# EAGLE board adapter_single (EAGLE 6.5.0)
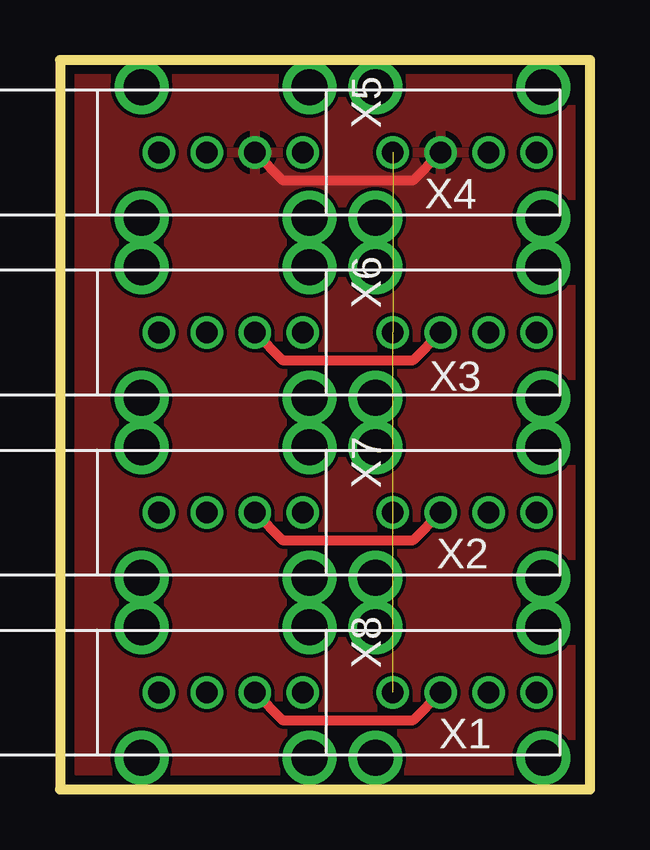
[diagram p0: board, top side]
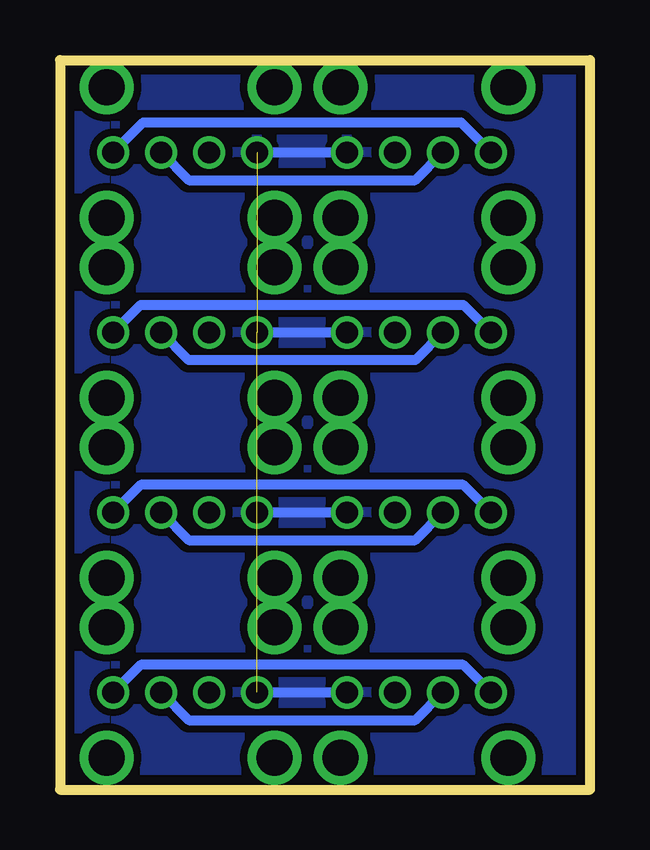
[diagram p1: board, bottom side, seen from below]

Size 22.1 x 30.4 mm. Coordinates in mm from the lower left corner, seen from the top.
Outline: 22.1,0 0,0 0,30.4 22.1,30.4 22.1,0
Copper layers (1*16): Top 0.0356mm / dielectric 1.5011mm / Bottom 0.0356mm
Design rules "LaenPCBOrder": minimum track width 6mil, minimum drill 13mil, track to track 6mil, track to pad 6mil, pad to pad 6mil, via to via 6mil, smd to smd 6mil, copper to edge 15mil, drill to drill 6mil, minimum pad ring 7mil, minimum via ring 7mil, stop-mask expansion 3mil, vias tented up to drill 0mil, thermal gap 10mil

## Footprints (pad centres in the part's own frame; a part is rotated, then mirrored left to right if it is on the bottom)
USB-A-HU = drill 0.9: D+ 2.73,0; D- 4.73,0; GND 0.73,0; VBUS 6.73,0 | drill 1.5: P$5 0,2.72; P$6 0,-2.72; P$7 7,2.72; P$8 7,-2.72

## Placement (x,y rotation side)
X1  USB-A-HU  [USB-A-HU]  13.15,4.05 0 top
X2  USB-A-HU  [USB-A-HU]  13.15,11.55 0 top
X3  USB-A-HU  [USB-A-HU]  13.15,19.05 0 top
X4  USB-A-HU  [USB-A-HU]  13.15,26.55 0 top
X5  USB-A-HU  [USB-A-HU]  3.4,26.55 0 top
X6  USB-A-HU  [USB-A-HU]  3.4,19.05 0 top
X7  USB-A-HU  [USB-A-HU]  3.4,11.55 0 top
X8  USB-A-HU  [USB-A-HU]  3.4,4.05 0 top

## Library data of the parts
X1-X8 = con-usb

## Nets
DM1: X4.D- X5.D+
DP1: X4.D+ X5.D-
GND: X1.GND X2.GND X3.GND X4.GND X5.VBUS X6.VBUS X7.VBUS X8.VBUS
N$1: X1.VBUS X8.GND
N$3: X3.D+ X6.D-
N$4: X3.D- X6.D+
N$6: X2.D+ X7.D-
N$7: X2.D- X7.D+
N$9: X1.D+ X8.D-
N$10: X2.VBUS X7.GND
N$11: X3.VBUS X6.GND
N$12: X4.VBUS X5.GND
N$13: X1.D- X8.D+

## Tracks (layer width: path | path; a pad name or v marks a point on that pad's centre or on a via)
DM1
  Bottom 0.406: X4.D- 16.73,25.4 7.28,25.4 X5.D+
DP1
  Top 0.406: X5.D- 9.28,25.4 14.73,25.4 X4.D+
  pour Top: 0.7,29.9 0.7,0.8 21.3,0.8 21.3,29.9
GND  (3 unrouted)
  Bottom 0.406: X4.GND X5.VBUS | X3.GND X6.VBUS | X2.GND X7.VBUS | X1.GND X8.VBUS
  pour Bottom (isolate 0.305): 0.6,29.9 0.6,0.8 21.4,0.8 21.4,29.9
GND1  (3 unrouted)
GND4  (3 unrouted)
GND7  (3 unrouted)
GND10  (3 unrouted)
N$1
  Bottom 0.406: X8.GND 5.28,5.2 18.73,5.2 X1.VBUS
N$3
  Top 0.406: X6.D- 9.28,17.9 14.73,17.9 X3.D+
N$4
  Bottom 0.406: X6.D+ 7.28,17.9 16.73,17.9 X3.D-
N$6
  Top 0.406: X7.D- 9.28,10.4 14.73,10.4 X2.D+
N$7
  Bottom 0.406: X2.D- 16.73,10.4 7.28,10.4 X7.D+
N$9
  Top 0.406: X8.D- 9.28,2.9 14.73,2.9 X1.D+
N$10
  Bottom 0.406: X7.GND 5.28,12.7 18.73,12.7 X2.VBUS
N$11
  Bottom 0.406: X3.VBUS 18.73,20.2 5.28,20.2 X6.GND
N$12
  Bottom 0.406: X4.VBUS 18.63,27.8 5.38,27.8 X5.GND
N$13
  Bottom 0.406: X1.D- 16.73,2.9 7.28,2.9 X8.D+